# Altium PCB PCB2.PcbDoc
Units mm, origin at the board's own origin, x right, y up, seen from the top; angles counter-clockwise.
Board outline 150 x 80 mm, 2 copper layers (Top Layer, Bottom Layer); 20 components, 28 nets, 64 pads, 0 vias.
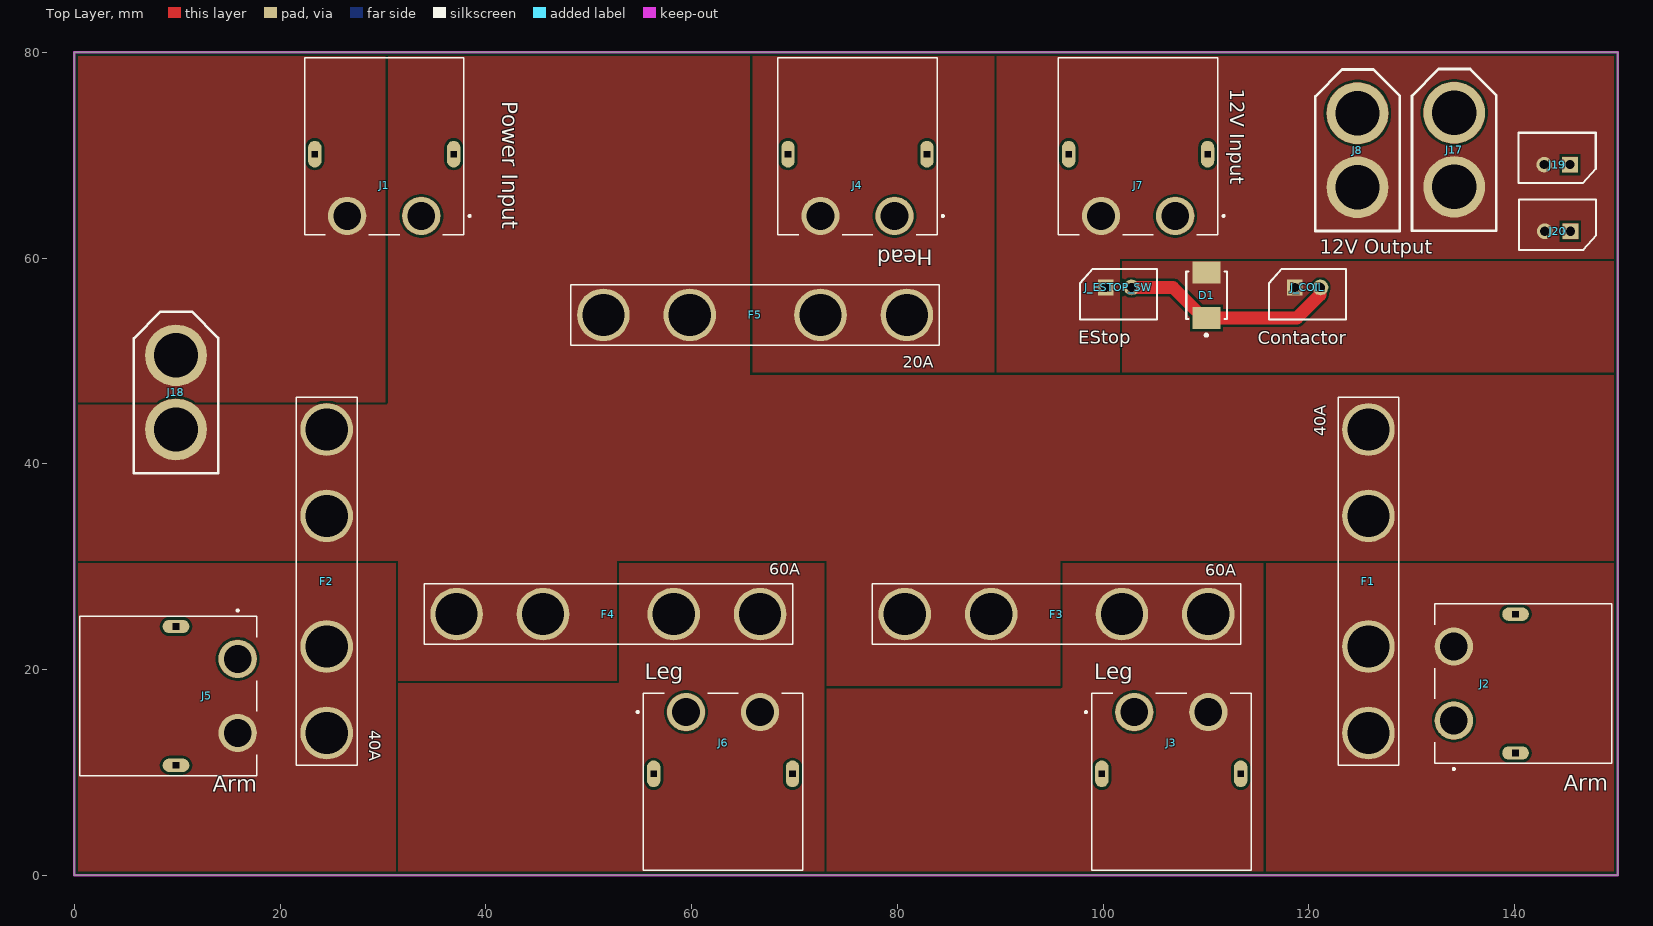
[diagram p0: Top Layer view]
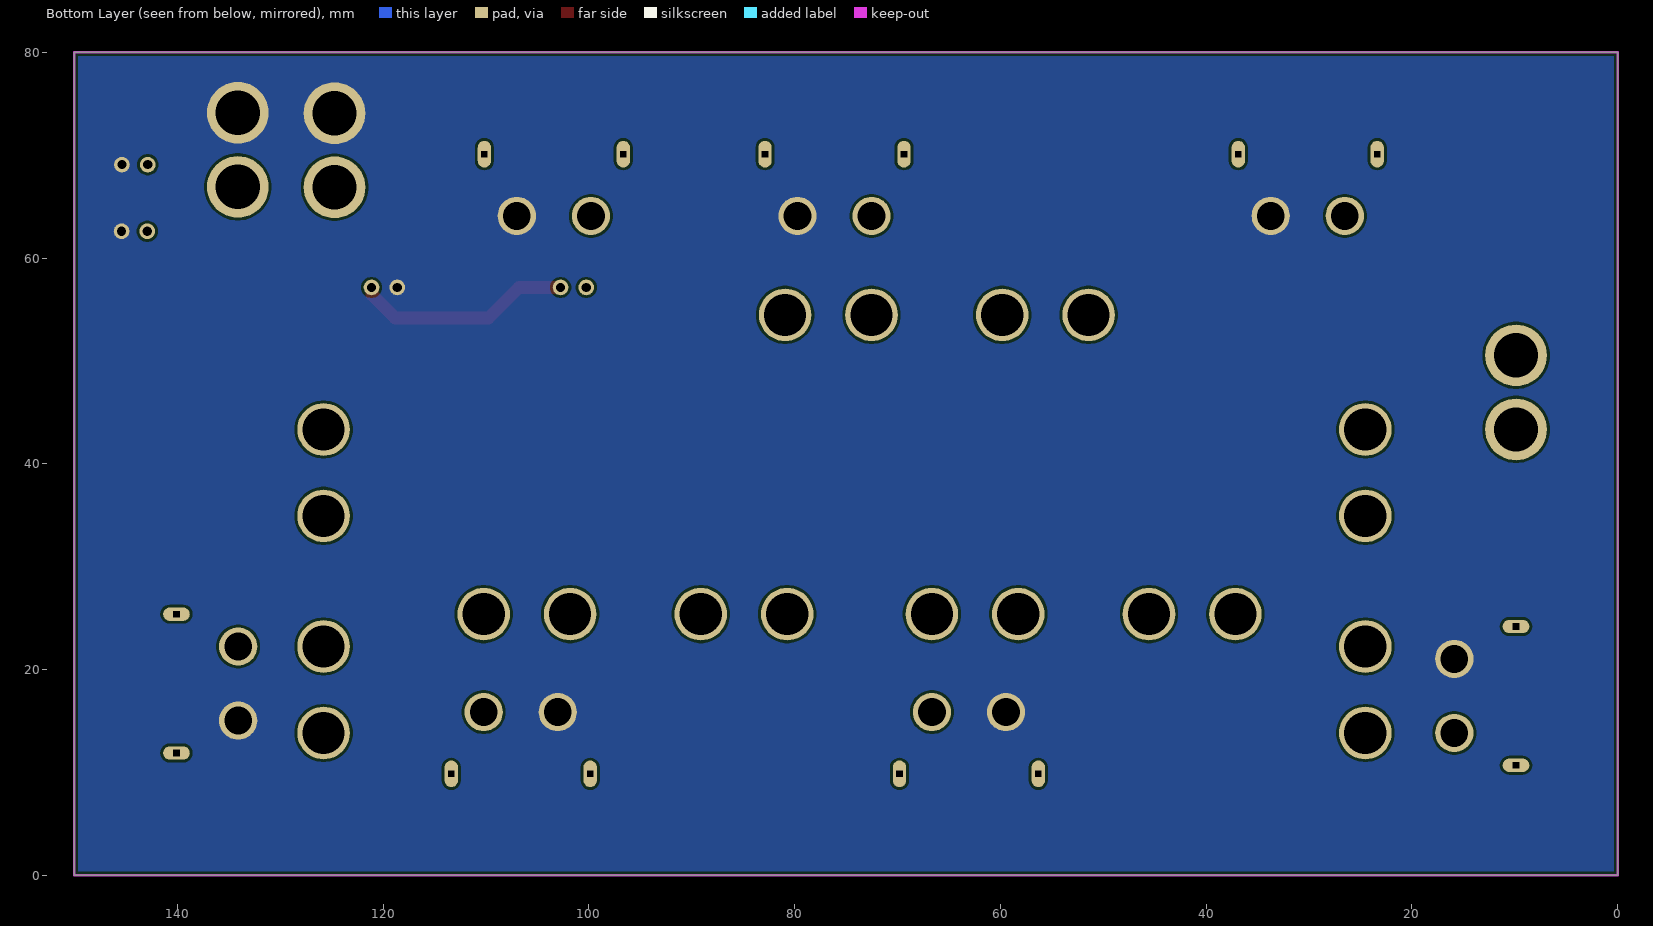
[diagram p1: Bottom Layer view, seen from below]
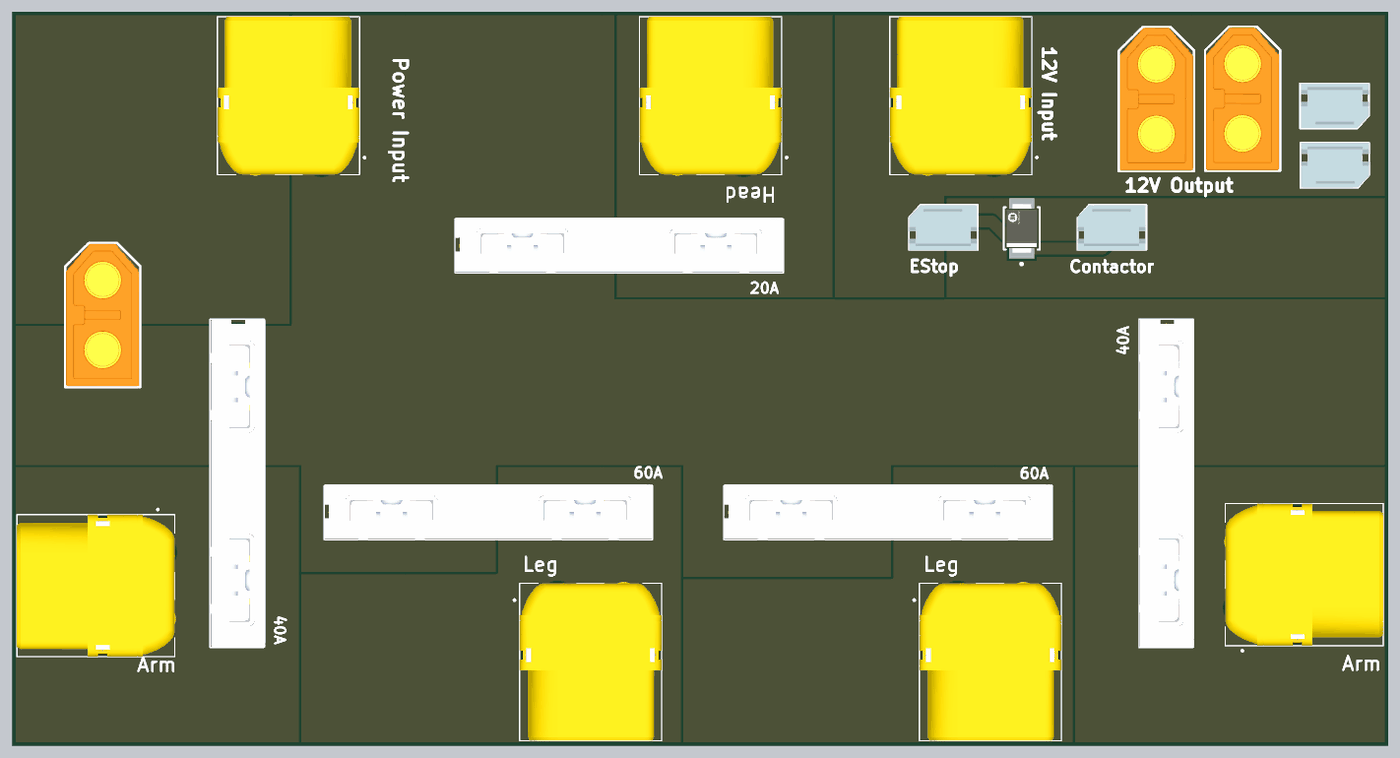
[diagram p2: 3D render of the assembled board from above, using the file's embedded part models]

## Layer stack, top to bottom
Top Solder: solder mask 0.0102, Solder Resist, Dk 3.5
Top Layer: signal copper 0.0356
Dielectric 1: dielectric 0.32, FR-4, Dk 4.8
Bottom Layer: signal copper 0.0356
Bottom Solder: solder mask 0.0102, Solder Resist, Dk 3.5

## Board outline
0,0 0,80 150,80 150,0

## Design rules (kind name [scope] priority, off if disabled: settings)
Clearance [All] p1: gap=0.254 ignorepadtopadclearanceinfootprint=FALSE
PlaneConnect [All] p1: planeconnectstyle=Direct reliefexpansion=0.508 reliefentries=4 reliefconductorwidth=0.254 reliefairgap=0.254
PolygonConnect [All] p1: connectstyle=Direct reliefconductorwidth=0.254 reliefentries=4 polygonreliefangle="90 Angle" airgapwidth=0.254
RoutingVias [All] p1: holewidth=0.711 width=1.27 viastyle="Through Hole" minholewidth=0.711 minwidth=1.27 maxholewidth=0.711 maxwidth=1.27
SolderMaskExpansion [All] p1: expansion=0.102 istentingtop=FALSE
SupplyNets "Schematic Supply Nets" [InNet('GND')] p1: voltage=0.000
UnRoutedNet [All] p1: checkbadconnections=TRUE
Width Width_1 [(InNet('5V') OR InNet('COIL_EN'))] p1: maxlimit=2.032 minlimit=0.254 preferedwidth=1.27 toplayer_minwidth=0.762 bottomlayer_maxwidth=0.254 bottomlayer_prefwidth=0.254 minimp=50.000000 maximp=50.000000 favimp=50.000000
Width [All] p2: maxlimit=0.254 minlimit=0.254 preferedwidth=0.254
28 further rules are at their usual default settings.

## Components (designator, comment, footprint, x,y, rotation, side; value= is the part's Value field where it differs from the comment)
D1 "cc" FP-403A-03-MFG 110.045,56.388 r90 top
F1 "40A" FUSE_CNX-02 125.778,28.6 r90 top
F2 "40A" FUSE_CNX-02 24.522,28.6 r90 top
F3 "60A" FUSE_CNX-02 95.465,25.4 r180 top
F4 "40A" FUSE_CNX-02 51.904,25.4 r180 top
F5 "20A" FUSE_CNX-02 66.167,54.483 r180 top
J1 "XT60PW-F" XT60PW-F 30.118,64.104 r180 top
J2 "XT60PW-F" XT60PW-F 134.081,18.65 r90 top
J3 "XT60PW-F" XT60PW-F 106.615,15.875 r0 top
J4 "XT60PW-F" XT60PW-F 76.117,64.104 r180 top
J5 "XT60PW-F" XT60PW-F 15.875,17.45 r270 top
J6 "XT60PW-F" XT60PW-F 63.054,15.875 r0 top
J7 "XT60PW-F" XT60PW-F 103.397,64.104 r180 top
J8 "XT60" XT60_F 124.714,70.485 r270 top
J17 "XT60" XT60_F 134.112,70.529 r270 top
J18 "XT60 SW" XT60_F 9.875,46.95 r270 top
J19 "Molex_2Pin" MOLEX_2PIN 142.875,69.088 r180 top
J20 "Molex_2Pin" MOLEX_2PIN 142.915,62.611 r180 top
J_COIL "Molex_2Pin" MOLEX_2PIN 121.118,57.15 r0 top
J_ESTOP_SW "Molex_2Pin" MOLEX_2PIN 102.743,57.15 r0 top

## Footprints (in the part's own frame and the unit in brackets; to place one, negate y for a bottom-side part, rotate by r counter-clockwise, add the part's x,y. Pads: shape width x height; smd on the part's side, far side on the other; paste and mask are expansions set on the pad)
FP-403A-03-MFG [mm]
  rect 2.159x2.743 smd paste+0 mask+0: 1(-2.21,0) 2(2.21,0)
  silkscreen extent -4,-1.97 2.3,1.97, body extent -3.39,-2.07 3.39,2.07, height 0.25
FUSE_CNX-02 [mm]
  round 5.116 hole 4.1 mask+0.102: 1_1(-14.75,0) 1_2(-6.35,0) 2_1(6.35,0) 2_2(14.75,0)
  silkscreen extent -17.9,-2.95 17.9,2.95, body extent -17.9,-3.08 17.9,2.92, height 11.37
MOLEX_2PIN [mil]
  rect 60x60 / inner round 60 / far side round 60 hole 35: 1(-98.43,0)
  round 60 hole 35: 2(0,0)
  silkscreen extent -197,-122 98,71, body extent -196,-123 95,70, height 233
XT60_F [mm]
  round 6 hole 4.3: 1(-3.6,0) 2(3.6,0)
  silkscreen extent -7.85,-4.1 7.85,4.1, body extent -7.8,-4 7.8,4, height 16.8
XT60PW-F [mm]
  round 3.716 hole 2.7: 1(-3.6,0) 2(3.6,0)
  oval 1.3x2.6 hole 0.6 square: S1(-6.75,-6) S2(6.75,-6)
  silkscreen extent -8.4,-15.35 7.75,1.85, body extent -7.75,-15.35 7.75,1.85, height 8.4

## Part data
D1: library part CMP-026-000004-1, "Rectifier Diode, Schottky, 1 Phase, 1 Element, 5A, 100V V(RRM), Silicon"
F1 F2 F3 F4 F5: library part CMP-027-000003-2, "Fuse Clip for Maxi Blade Fuse, 250VDC/500VAC, 80A", Package=None, Check_prices=https://www.snapeda.com/parts/CNX-02/Optifuse/view-part/?ref=eda, Component Type=Standard, Design Item ID=CNX-02, MF=OptiFuse, MP=CNX-02, Pin Count=4, SnapEDA_Link=https://www.snapeda.com/parts/CNX-02/Optifuse/view-part/?ref=snap, Source=CNX-02.SchLib
J1 J2 J3 J4 J5 J6 J7: library part CMP-019-000058-2, "Socket DC Supply Connector Female", Package=Package, Availability="Not in stock", Check_prices=https://www.snapeda.com/parts/XT60PW-F/AMASS/view-part/?ref=eda, Design Item ID=XT60PW-F, MF=AMASS, MP=XT60PW-F, Price=None, SnapEDA_Link=https://www.snapeda.com/parts/XT60PW-F/AMASS/view-part/?ref=snap, Source=robit_connector.SchLib, System=Connector
J8 J17 J18: library part CMP-019-000061-2, "XT60 connector", System=Connector
J19 J20 J_COIL J_ESTOP_SW: library part CMP-019-000043-2, "Molex 2Pin Connector", Design Item ID=Molex_2Pin, Source=robit_connector.SchLib, System=Connector

## Nets (pads, with @x,y where several pads share a name; then routed paths per layer and width w, separated by ;. In a path a pad name is that pad's centre, name@x,y a point inside that pad or via, vN(x,y) a via of type N, cw(c..) or ccw(c..) an arc to the next point about the centre after c; other vN are vias at no path point)
5V: 
12v_IN: J7.2 J8.2 J17.2 J19.2 J20.2 J_ESTOP_SW.1
ARM_L: F2.1_1 F2.1_2 J5.2
ARM_R: F1.1_1 F1.1_2 J2.2
CAN_H: 
CAN_L: 
COIL_EN: D1.1 J_COIL.2 J_ESTOP_SW.2 | length 21.2
  Top Layer w1.27: J_ESTOP_SW.2 106.781,57.15 109.753,54.178 D1.1 118.821,54.178 121.069,56.426 121.069,57.101 J_COIL.2
GND: D1.2 J1.1 J2.1 J3.1 J4.1 J5.1 J6.1 J7.1 J8.1 J17.1 J19.1 J20.1 J_COIL.1
HEAD: F5.1_1 F5.1_2 J4.2
LEG_L: F4.1_1 F4.1_2 J6.2
LEG_R: F3.1_1 F3.1_2 J3.2
NetC3_2: 
NetC4_2: 
NetC5_2: 
NetD2_1: 
NetD3_1: 
NetQ1_1: 
NetQ1_2: 
NetQ1_3: 
NetQ2_1: 
NetQ2_2: 
NetR4_1: 
NetR5_2: 
NetR6_1: 
NetU2_13: 
NetU2_14: 
v_IN: J1.2 J18.1
V_IN_SW: F1.2_1 F1.2_2 F2.2_1 F2.2_2 F3.2_1 F3.2_2 F4.2_1 F4.2_2 F5.2_1 F5.2_2 J18.2
pads on no net: J1.S1 J1.S2 J2.S1 J2.S2 J3.S1 J3.S2 J4.S1 J4.S2 J5.S1 J5.S2 J6.S1 J6.S2 J7.S1 J7.S2

## Polygon pours and split planes (outlines as drawn)
v_IN on Top Layer "V_IN_L01_P000" (solid, pour order 0): 0,80 0,46 30.226,46 30.226,80
12v_IN on Top Layer "12V_IN_L01_P001" (solid, pour order 1): 101.6,59.944 109.728,59.944 150,59.944 150,79.809 112.215,79.809 89.662,80.01 89.662,48.895 101.6,48.895
LEG_R on Top Layer "LEG_R_L01_P004" (solid, pour order 4): 73.152,0 73.152,18.415 95.815,18.415 95.815,30.607 115.57,30.607 115.57,0
LEG_L on Top Layer "LEG_L_L01_P006" (solid, pour order 6): 31.369,0 31.369,18.684 52.705,18.684 52.705,30.48 72.884,30.48 72.884,0
V_IN_SW on Top Layer "V_IN_SW_L01_P002" (solid, pour order 2): 52.705,30.607 73.152,30.607 73.152,18.415 95.815,18.415 95.815,30.607 150,30.607 150,48.641 65.659,48.641 65.659,80 30.226,80 30.226,46.482 0.127,46.482 0.127,30.607 31.496,30.607 31.496,18.923 52.705,18.923
ARM_R on Top Layer "ARM_R_L01_P005" (solid, pour order 5): 150,0 150,30.353 115.624,30.353 115.624,0
GND on Top Layer "GND_L01_P008" (solid, pour order 8): 0,0 0,80 150,80 150,0
HEAD on Top Layer "HEAD_L01_P007" (solid, pour order 7): 89.662,80 65.913,80 65.913,48.768 89.662,48.768
ARM_L on Top Layer "ARM_L_L01_P003" (solid, pour order 3): 0,0 0,30.734 31.242,30.734 31.242,0
GND on Bottom Layer "GND_L02_P009" (solid, pour order 9): 0,0 0,80 150,80 150,0

## Keep-outs
Keep-Out Layer:
  the board outline again, w0.254

## Silkscreen, mask and mechanical layers (free items; w line width, h text height)
Top Overlay:
  text "12V Input" at 112.353,76.454 h1.4 r270
  text "Power Input" at 41.58,75.26 h1.52 r270
  text "Head" at 83.439,60.833 h1.52 r180
  text "12V Output" at 121.031,60.41 h1.4
  text "EStop" at 97.587,51.655 h1.27
  text "Contactor" at 115.042,51.632 h1.27
  text "60A" at 67.564,29.21 h1.14
  text "Leg" at 55.46,19.05 h1.52
  text "Leg" at 99.148,19.05 h1.52
  text "Arm" at 144.78,8.248 h1.52
  text "Arm" at 13.462,8.128 h1.52
Bottom Overlay: